# Altium PCB 9vpwr.PcbDoc
Units mm, origin at the board's own origin, x right, y up, seen from the top; angles counter-clockwise.
Board outline 98.27 x 45.82 mm, 2 copper layers (Top Layer, Bottom Layer); 11 components, 7 nets, 32 pads, 0 vias.
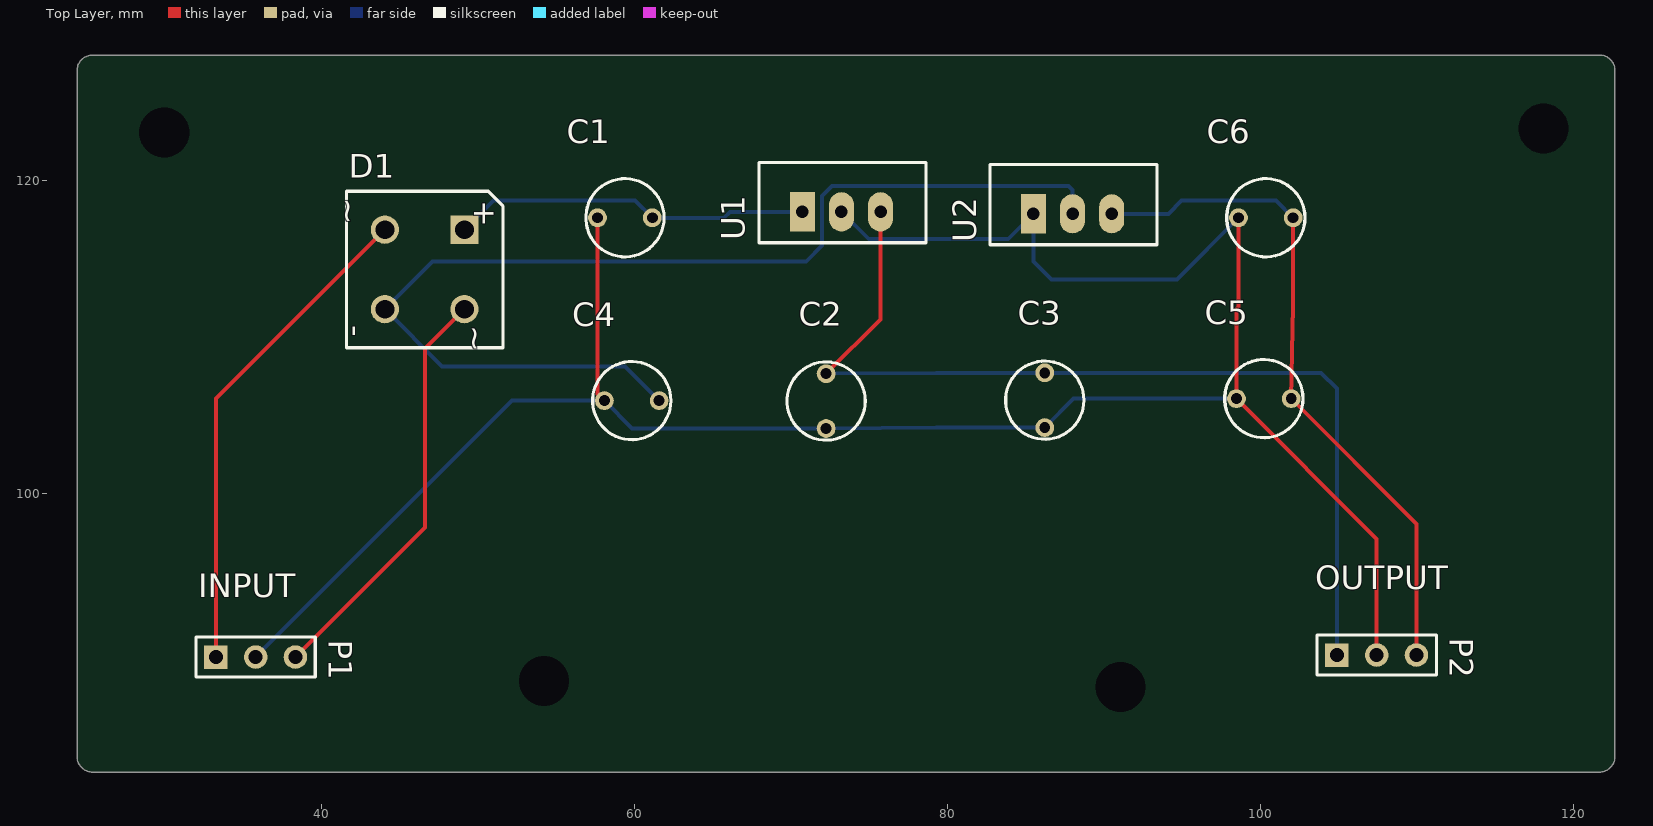
[diagram p0: Top Layer view]
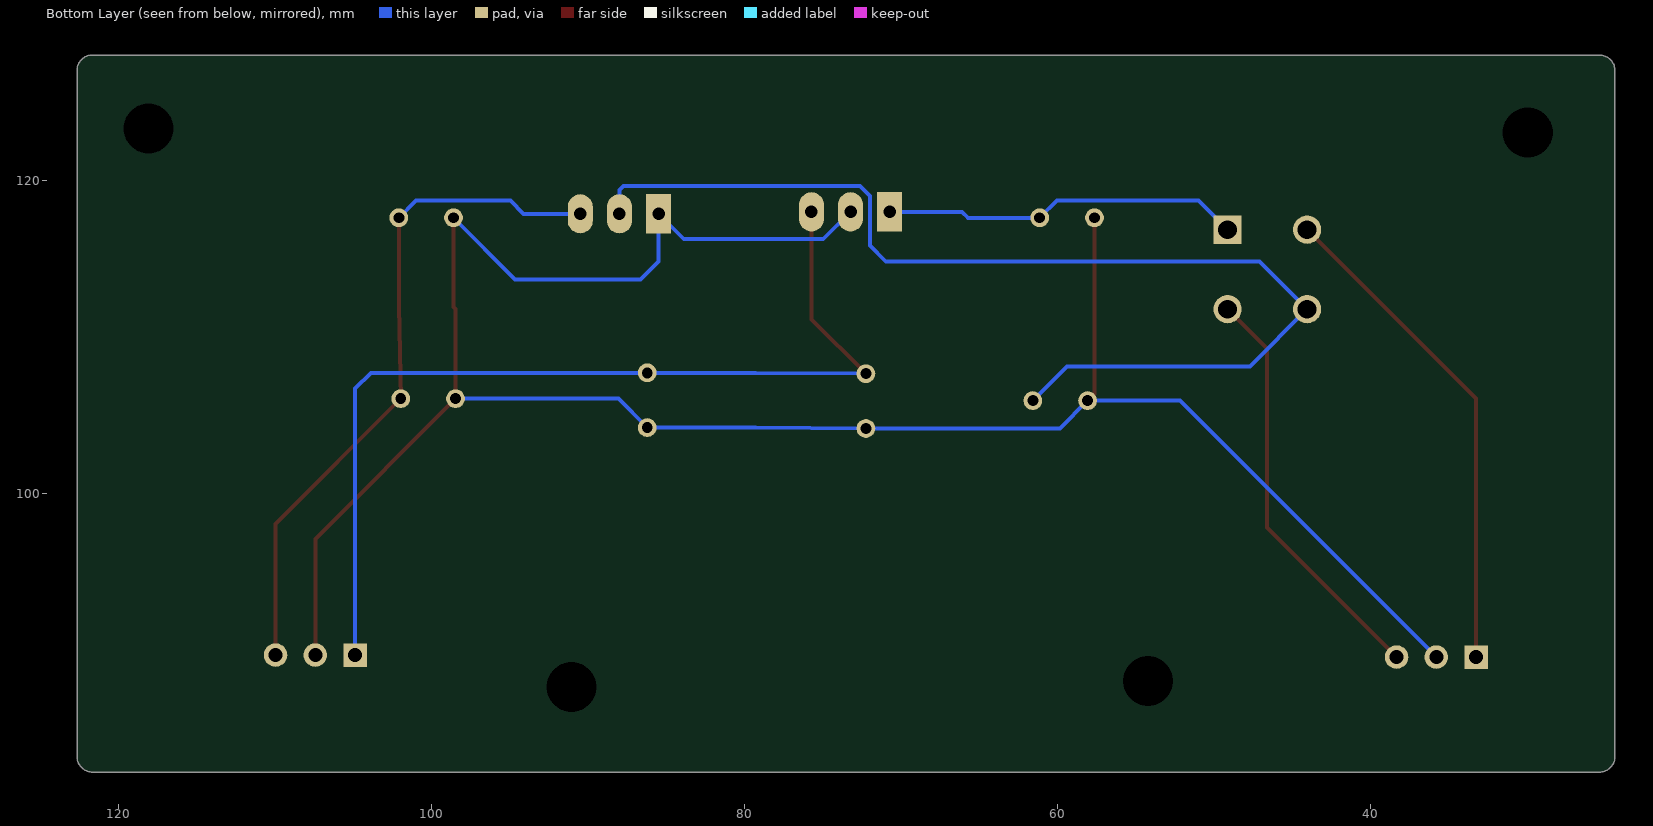
[diagram p1: Bottom Layer view, seen from below]
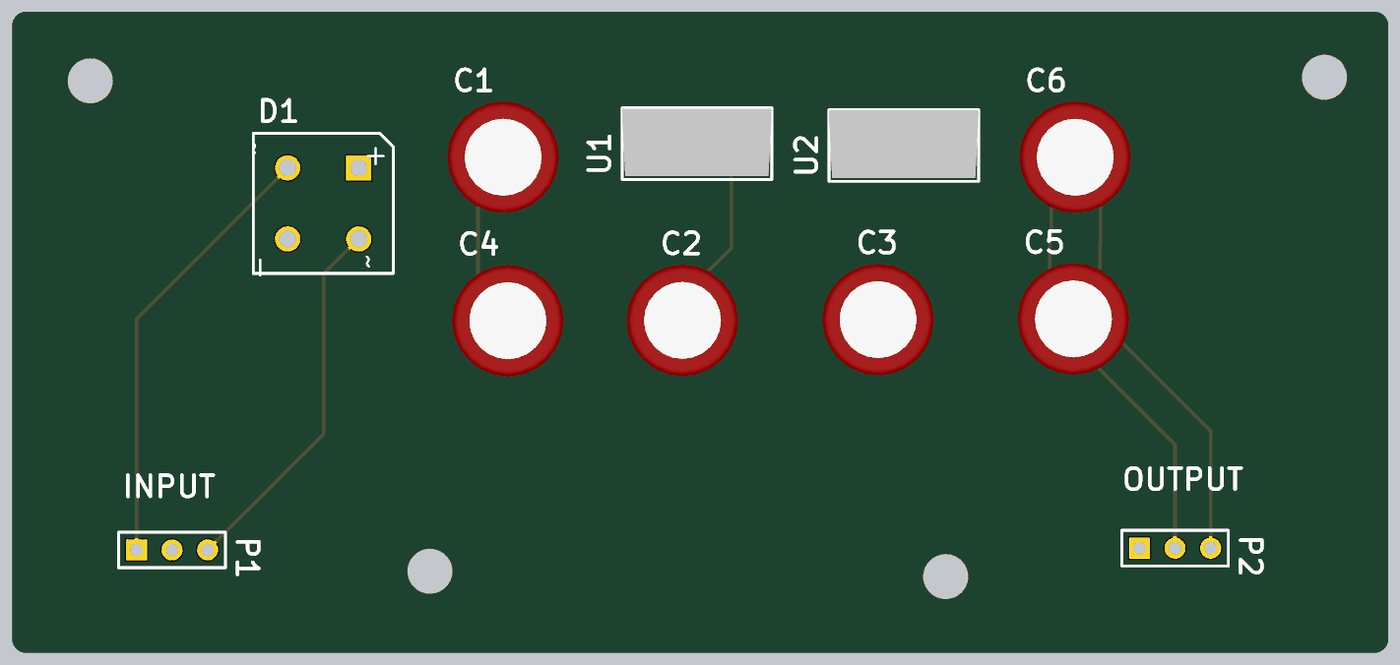
[diagram p2: 3D render of the assembled board from above, using the file's embedded part models]

## Layer stack, top to bottom
Top Solder: solder mask 0.0102, Solder Resist, Dk 3.5
Top Layer: signal copper 0.0356
Dielectric 1: dielectric 0.32, FR-4, Dk 4.8
Bottom Layer: signal copper 0.0356
Bottom Solder: solder mask 0.0102, Solder Resist, Dk 3.5

## Board outline
25.4,82.185 cw(c25.4,83.185) 24.4,83.185 24.4,127 cw(c25.4,127) 25.463,127.998 cw(c25.527,127) 25.527,128 121.666,128 cw(c121.666,127) 122.666,127 122.666,83.185 cw(c121.666,83.185) 121.666,82.185

## Design rules (kind name [scope] priority, off if disabled: settings)
Clearance [All] p1: gap=0.254 ignorepadtopadclearanceinfootprint=TRUE except(0: Arc-Hole Track-Hole SMDPad-Hole THPad-Hole Via-Hole Fill-Hole Poly-Hole Region-Hole Text-Hole)
Height [All] p1: minheight=0 maxheight=50.8 prefheight=25.4
PolygonConnect [All] p1: connectstyle=Relief reliefconductorwidth=0.254 reliefentries=4 polygonreliefangle="90 Angle" airgapwidth=0.254
RoutingVias [All] p1: holewidth=0.711 width=1.27 viastyle="Through Hole" minholewidth=0.711 minwidth=1.27 maxholewidth=0.711 maxwidth=1.27
SilkToSilkClearance [All] p1: silktosilkclearance=0.127
SilkToSolderMaskClearance [IsPad] p1: minsilkscreentomaskgap=0.01 clearancetoexposedcopper=TRUE
SolderMaskExpansion [All] p1: expansion=0.102
Width [All] p1: maxlimit=0.254 minlimit=0.254 preferedwidth=0.254
27 further rules are at their usual default settings.

## Components (designator, comment, footprint, x,y, rotation, side; value= is the part's Value field where it differs from the comment)
C1 "2200uF" "Cap NP" 57.658,117.602 r0 top
C2 "100nF" "Cap NP" 72.263,104.14 r90 top
C3 "10uF" "Cap NP" 86.233,104.196 r90 top
C4 "2200uF" "Cap NP" 61.595,105.918 r180 top
C5 "100nF" "Cap NP" 101.981,106.045 r180 top
C6 "10uF" "Cap NP" 102.108,117.602 r180 top
D1 "Bridge1" D-38 46.609,114.3 r270 top
P1 "Header 3" HDR1X3 33.274,89.535 r0 top
P2 "Header 3" HDR1X3 104.902,89.662 r0 top
U1 "LM7809" "TIP 31" 70.739,117.983 r90 top
U2 "LM7909" "TIP 31" 85.511,117.856 r90 top

## Footprints (in the part's own frame and the unit in brackets; to place one, negate y for a bottom-side part, rotate by r counter-clockwise, add the part's x,y. Pads: shape width x height; smd on the part's side, far side on the other; paste and mask are expansions set on the pad)
"Cap NP" [mm]
  round 1.2 hole 0.7: 1(0,0) 2(3.5,0)
  silkscreen extent -0.75,-2.5 4.25,2.5, body extent -2.2,-4 5.8,4, height 12
D-38 [mm] "Bridge Rectifier; 4 Terminals; Body 9.4 x 9.4 mm (typ); Pitch 5.08 mm"
  rect 1.8x1.8 hole 1.2: 1(-2.54,2.54)
  round 1.8 hole 1.2: 2(-2.54,-2.54) 3(2.54,-2.54) 4(2.54,2.54)
  silkscreen extent -5,-5 5,5, body extent -5,-5 5,5, height 9.91
HDR1X3 [mm] "Connector; Header; 3 Position"
  rect 1.5x1.5 hole 0.9: 1(0,0)
  round 1.5 hole 0.9: 2(2.54,0) 3(5.08,0)
  silkscreen extent -1.27,-1.27 6.35,1.27
"TIP 31" [mm]
  rect 2.5x1.6 / inner rect 2.5x16 / far side rect 2.5x1.6 hole 0.8: 1(0,0)
  oval 2.5x1.6 / inner oval 2.5x16 / far side oval 2.5x1.6 hole 0.8: 2(0,-2.5) 3(0,-5)
  silkscreen extent -1.98,-7.9 3.15,2.78, body extent -1.73,-7.88 3.1,2.78, height 22.62

## Part data
C1 C2 C3 C4 C5 C6: library part Cap_NP
D1: "Full Wave Diode Bridge", DatasheetVersion=E2732B, LatestRevisionDate=29-May-2009, LatestRevisionNote="Sch pins A & K swapped.", PackageDescription="Bridge Rectifier; 4 Terminals; Body 9.4 x 9.4 mm (typ); Pitch 5.08 mm", PackageReference=D-38, Published=8-Jun-2000, Publisher="Altium Limited"
P1 P2: "Header, 3-Pin", LatestRevisionDate=17-Jul-2002, LatestRevisionNote="Re-released for DXP Platform.", Publisher="Altium Limited"

## Free pads (board coordinates)
  round 1.524 hole 3.2: 10(29.972,123.063) 11(118.11,123.317) 12(54.229,88.011) 13(91.059,87.63)

## Nets (pads, with @x,y where several pads share a name; then routed paths per layer and width w, separated by ;. In a path a pad name is that pad's centre, name@x,y a point inside that pad or via, vN(x,y) a via of type N, cw(c..) or ccw(c..) an arc to the next point about the centre after c; other vN are vias at no path point)
+9: C2.2 C3.2 P2.1 U1.3 | length 61.9
  Top Layer w0.254: C2.2 75.739,111.116 U1.3
  Bottom Layer w0.254: C2.2 79.304,107.696 C3.2 103.886,107.696 104.902,106.68 P2.1
-9: C5.1 C6.1 P2.3 U2.3 | length 43.7
  Top Layer w0.254: C6.1 102.108,111.963 C5.1 109.982,98.044 P2.3
  Bottom Layer w0.254: U2.3 94.132,117.856 94.971,118.694 101.016,118.694 C6.1
GND: C1.1 C2.1 C3.1 C4.2 C5.2 C6.2 P1.2 P2.2 U1.2 U2.1 | length 146.4
  Top Layer w0.254: C1.1 57.658,106.355 C4.2 ; C6.2 98.608,111.887 98.481,111.76 C5.2 107.442,97.084 P2.2
  Bottom Layer w0.254: P1.2 52.197,105.918 C4.2 59.873,104.14 C2.1 79.304,104.196 C3.1 88.082,106.045 C5.2 ; U1.2 74.992,116.23 83.885,116.23 U2.1 85.511,114.808 86.654,113.665 94.671,113.665 C6.2
NetC1_2: C1.2 D1.1 U1.1 | length 23
  Bottom Layer w0.254: D1.1 51.003,118.694 60.066,118.694 C1.2 65.735,117.602 66.116,117.983 U1.1
NetC4_1: C4.1 D1.3 U2.2 | length 70.6
  Bottom Layer w0.254: C4.1 59.411,108.102 47.727,108.102 D1.3 47.117,114.808 70.993,114.808 72.009,115.824 72.009,118.999 72.644,119.634 87.757,119.634 88.011,119.38 U2.2
NetD1_2: D1.2 P1.1 | length 31.8
  Top Layer w0.254: P1.1 33.274,106.045 D1.2
NetD1_4: D1.4 P1.3 | length 26.7
  Top Layer w0.254: P1.3 46.634,97.815 46.634,109.245 D1.4

## Silkscreen, mask and mechanical layers (free items; w line width, h text height)
Top Overlay:
  text "OUTPUT" at 103.505,93.853 h1.52
  text "INPUT" at 32.131,93.345 h1.52
Mechanical 15:
  lines w2: 25.4,127 25.4,83.185 121.666,83.185 121.666,127 25.527,127

## Text inside footprints (layer, text, board x,y; h text height)
D1: Top Overlay "~" at 49.149,110.744 h1.5 r270; Top Overlay "~" at 41.021,118.872 h1.5 r270; Top Overlay "-" at 41.529,110.744 h1.5 r270; Top Overlay "+" at 49.773,118.71 h1.5 r270